# Altium PCB RF_PCB-v1.PcbDoc (part 2 of 2)
Units mil, origin at the board's own origin, x right, y up, seen from the top; angles counter-clockwise.
Board outline 4468.5 x 3267.72 mil, 2 copper layers (Top Layer, Bottom Layer); 64 components, 52 nets, 328 pads, 70 vias.
Unrouted connection lines stored in the file: 1.
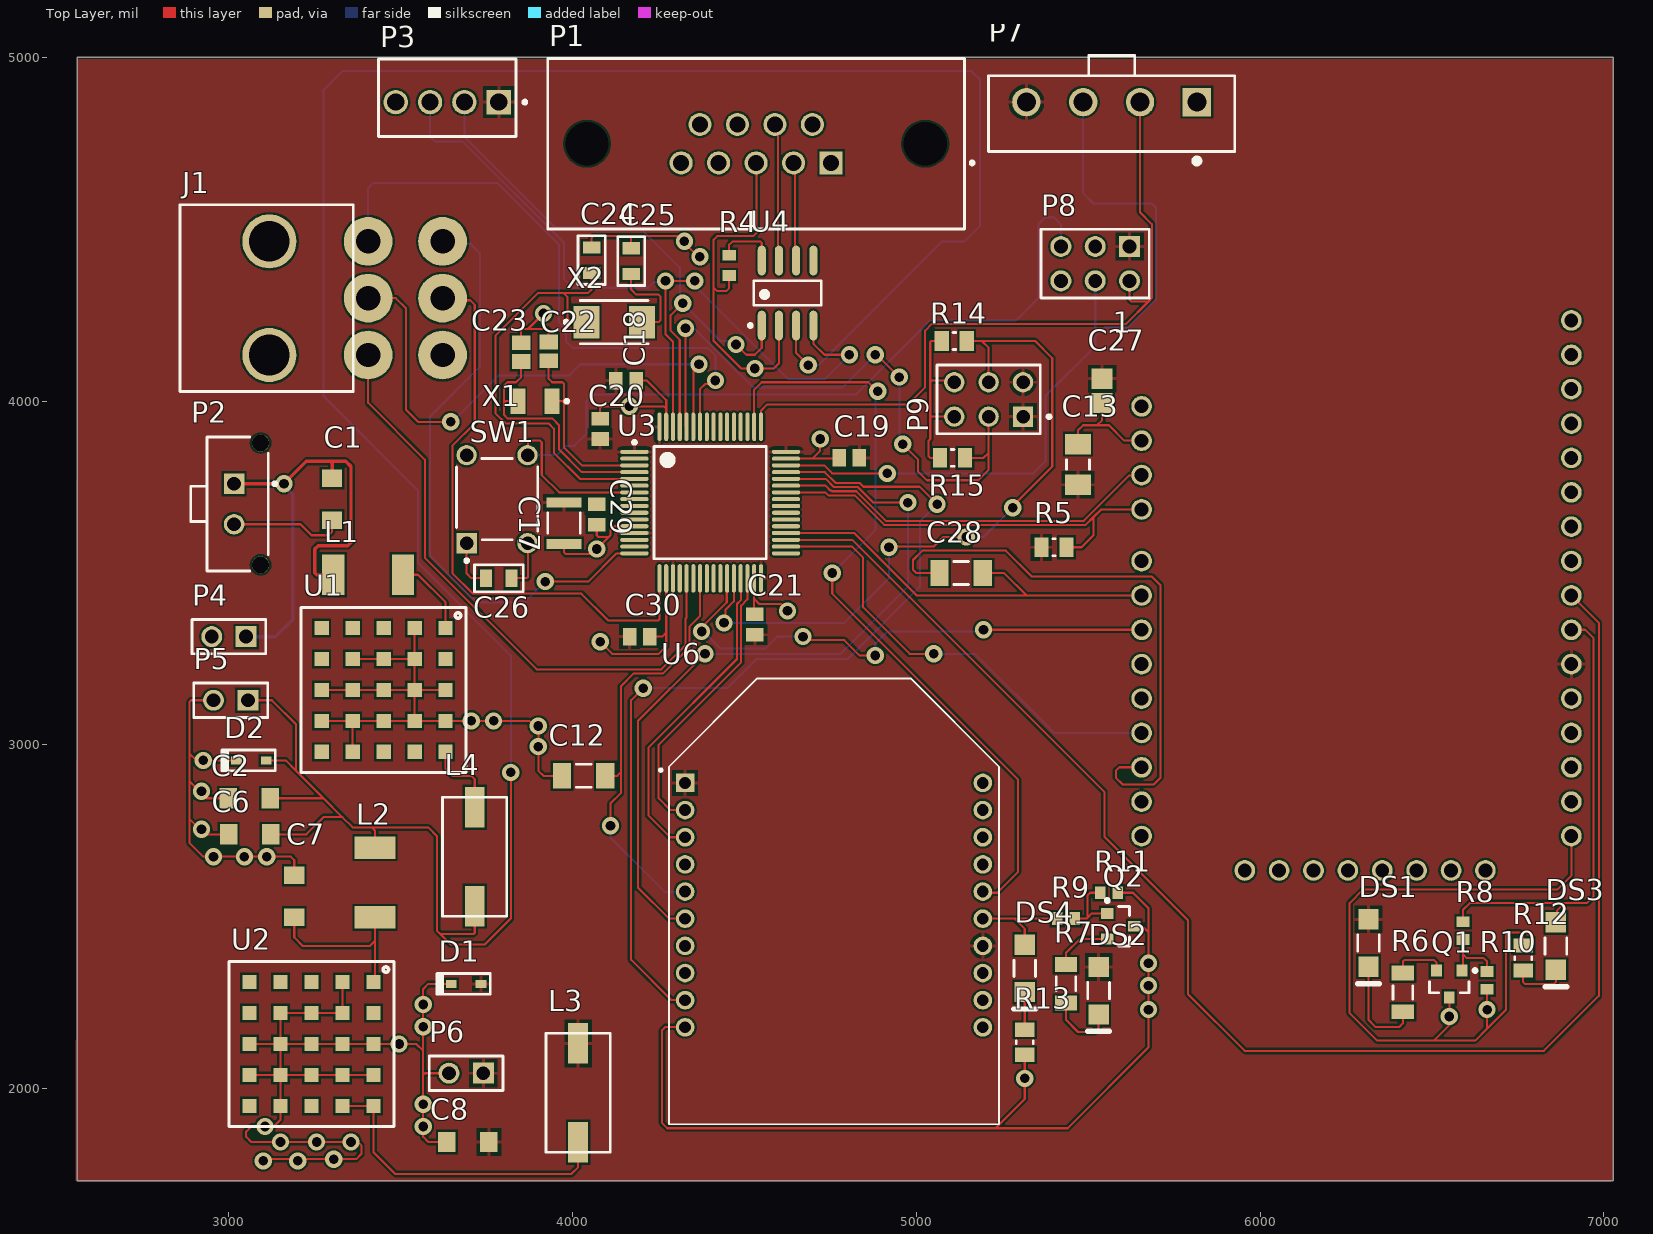
[diagram p0: Top Layer view]

## Via types
v1: diameter 50, hole 28, Top Layer to Bottom Layer, 70 vias

## Nets (pads, with @x,y where several pads share a name; then routed paths per layer and width w, separated by ;. In a path a pad name is that pad's centre, name@x,y a point inside that pad or via, vN(x,y) a via of type N, cw(c..) or ccw(c..) an arc to the next point about the centre after c; other vN are vias at no path point) (continued)
BOOT1: (continued)
  Top Layer w6: v1@4445,3360 4445,3393.94 4468.9,3417.84 U3.28 ; v1(4920,3575) 4922,3577 5049.5,3577 5077.5,3605 v1(5145,3605) ; R14.2 5190,4175 ; P9.4 5210,4155 5190,4175 ; v1(5280,3690) 5280,3695 5395,3810 5395,4125 5345,4175 5190,4175
  Bottom Layer w6: v1(4440,3355) 4790,3355 4920,3485 v1(4920,3575) ; v1(5145,3605) 5195,3605 v1(5280,3690)
CANH: P1.7 U4.7 | length 400.9
  Top Layer w6: P1.7 4596.63,4796.48 4596.63,4412.35 U4.7
CANL: P1.2 U4.6 | length 287.3
  Top Layer w6: P1.2 4646.63,4689.2 4646.63,4412.35 U4.6
GND: 1.1 1.11 1.13 1.22 1.35 C1.2 C2.1 C6.2 C7.1 C8.1 C12.1 C17.1 C18.1 C19.1 C20.1 C21.1 C22.1 C23.1 C24.1 C25.1 C28.1 C29.1 C30.1 D1.1 D2.1 P1.3 P1.6 P2.2 P3.4 P4.2 P5.2 P6.2 P7.1 P8.3 P9.5 P9.6 Q1.3 Q2.3 R4.1 R10.2 R11.2 R12.1 R13.1 R14.1 R15.1 SW1.2 U1.A3 U1.A4 U1.B1 U1.B2 U1.B3 U1.B4 U1.C2 U1.C3 U1.C4 U1.D2 U1.D3 U1.D4 U1.D5 U1.E3 U1.E4 U2.A3 U2.A4 U2.B1 U2.B2 U2.B3 U2.B4 U2.C2 U2.C3 U2.C4 U2.D2 U2.D3 U2.D4 U2.D5 U2.E3 U2.E4 U3.12 U3.18 U3.31 U3.47 U3.63 U4.2 U6.10 | length 16704.1
  Top Layer w6: P5.2 2950,3135 2945,3130 2890,3130 2885,3125 2885,2975 ; C2.1 2935,2845 2885,2895 ; C6.2 2930,2740 2885,2785 ; P2.2 3208.11,3641.89 3240,3610 3290,3610 3300,3620 C1.2 ; D2.1 v1(2925,2955) 2905,2955 2885,2975 ; U2.E4 U2.D4 ; U2.E3 U2.D3 ; v1@3100,1795 v1(3305,1795) 3370,1795 3385,1810 3385,1835 3375,1845 v1(3355,1845) v1(3255,1845) v1(3150,1845) 3065,1845 3050,1860 3050,1875 3065,1890 v1(3105,1890) 3130,1890 3149.84,1909.84 U2.D5 U2.D4 ; C7.1 3190,2665 3180,2675 v1(3110,2675) v1(3045,2675) v1(2955,2675) 2925,2675 2885,2715 2885,2785 ; U1.E4 U1.D4 ; U1.E3 U1.D3 U1.C3 U1.B3 ; U2.B1 U2.B2 U2.C2 U2.D2 U2.D3 ; U1.D5 U1.D4 ; U1.D2 U1.C2 U1.B2 ; U2.A4 U2.B4 U2.C4 U2.D4 ; U1.B1 U1.B2 ; U1.A3 U1.B3 ; C8.1 3580,1845 3565,1860 v1(3565,1890) v1(3565,1955) 3565,2040 ; P6.2 3570,2045 3565,2040 ; D1.1 3580,2305 3565,2290 v1(3565,2245) v1(3565,2180) 3565,2110 ; C23.1 3850,4205 3855,4210 3870,4210 ; v1(3915,4255) 3870,4210 ; C22.1 3930,4205 3925,4210 3870,4210 ; C12.1 3915,2910 3900,2925 v1(3900,2995) v1(3900,3055) 3888.09,3055 3873.25,3069.84 U1.A4 U1.B4 ; C17.1 3975,3560 3980,3555 4055,3555 v1(4070,3570) 4105,3605 ; C24.1 4055,4475 4060,4480 4165,4480 ; C29.1 4070,3610 4075,3605 4105,3605 ; v1(4080,3300) 4115,3265 4250,3265 4272.05,3287.05 4272.05,3327.05 ; C20.1 4080,3980 4085,3985 v1(4165,3985) 4265,3985 4272.05,3977.95 ; C25.1 4170,4475 4165,4480 ; U3.12 4121.1,3636.1 4110,3625 4110,3610 4105,3605 ; C18.1 4215,4060 4272.05,4002.95 4272.05,3977.95 ; C30.1 4260,3315 4272.05,3327.05 ; U3.18 4272.05,3327.05 ; U3.63 4272.05,3977.95 ; U6.10 4325.5,2180 4270,2180 4260,2170 4260,1900 4275,1885 5230,1885 ; v1(4370,4420) 4365,4420 4305,4480 4165,4480 ; R4.1 4455,4328.51 4446.49,4320 4420,4320 4410,4330 ; U3.31 4527.95,3425 ; C21.1@4530,3394.53 4527.95,3396.57 4527.95,3425 ; P1.3 4535,4691.77 4535,4490 4525,4480 4420,4480 4410,4470 4410,4330 ; U4.2 4600,4110 4585,4095 v1(4530,4095) 4490,4095 4410,4175 4410,4330 ; U3.47 4696.71,3832.95 ; v1(4625,3390) 4605,3410 4542.95,3410 4527.95,3425 ; v1(4720,3890) 4720,3856.24 4696.71,3832.95 ; C19.1 4772.95,3832.95 4696.71,3832.95 ; C28.1 5000,3500 4990,3510 4990,3538 5017,3565 5260,3565 5335,3490 5685,3490 5710,3465 5710,2905 5690,2885 5600,2885 5580,2905 5580,2925 5590,2935 1.11 ; R15.1 5040,3835 5035,3840 5035,3885 5040,3890 5040,3960 ; R14.1 5043.51,4175 5040,4171.49 5040,4055 ; P9.5 5045,3955 5040,3960 ; P9.6 5105,4060 5045,4060 5040,4055 ; R13.1 v1(5315,2030) 5315,1970 5230,1885 ; R11.2 5630,2570 5675,2525 5675,2455 ; Q2.3 5657.4,2472.6 5675,2455 ; Q1.3 v1(6550,2210) 6550,2185 6505,2140 ; R10.2 v1(6660,2230) 6660,2175 ; R12.1 6765,2445 6755,2455 6720,2455 6715,2450 6715,2230 6660,2175 ; 1.22 6905,2620 6865,2580 6300,2580 6260,2540 6260,2220 6340,2140 6505,2140 ; 2885,2785 2885,2895 ; 2885,2895 2885,2975 ; U2.D4 U2.D3 ; U2.D3 U2.C3 U2.B3 U2.A3 3545,2130 3565,2110 ; U1.D4 U1.C4 U1.B4 ; U1.B4 U1.B3 ; U1.B3 U1.B2 ; 3565,2040 3565,2110 ; 5040,3960 5040,4055 ; 5230,1885 5440,1885 5675,2120 v1(5675,2230) v1(5675,2300) v1(5675,2365) 5675,2455 ; 6505,2140 6625,2140 6660,2175
  other v1: 3100,1790 3200,1790 3495,2130 2920,2755 2920,2865 3705,3070 3770,3070 4325,4465
Net1_2: 1.2 C13.1 C27.1 | length 320.6
  Top Layer w6: C13.1 5470,3915 5485,3930 5525,3930 ; C27.1 5540,3945 5525,3930 ; 1.2 5605,3885 5560,3930 5525,3930
Net1_3: 1.3 U3.43 | length 1132
  Top Layer w6: U3.43 4735.79,3754.21 4750,3740 4753.03,3740 4755.03,3738 4825,3738 4911,3652 5487,3652 5619.39,3784.39 5654.39,3784.39 1.3
Net1_4: 1.4 R5.1 U3.42 | length 1238.4
  Top Layer w6: U3.42 4735.03,3734.53 4743.56,3726 4820,3726 4906,3640 5491.97,3640 5515,3663.03 ; R5.1 5480,3575 5515,3610 5515,3663.03 ; 1.4 5536.97,3685 5515,3663.03
Net1_6: 1.6 C28.2 U3.36 | length 1263.6
  Top Layer w6: U3.36 4818.58,3616.42 5000,3435 5320,3435 ; C28.2 5255,3500 5320,3435 ; 1.6 5320,3435
Net1_7: 1.7 U3.27 | length 1574.8
  Top Layer w6: v1(4375,3330) 4375,3341.92 4448.1,3415.02 4448.1,3483.42 U3.27 ; v1(4670,3315) 4680,3305 4790,3305 4835,3260 v1(4880,3260) ; v1(5195,3335) 1.7
  Bottom Layer w6: v1(4375,3330) 4380,3330 4430,3280 4560,3280 4595,3315 v1(4670,3315) ; v1(4880,3260) 4880,3295 4915,3330 5190,3330 v1(5195,3335)
Net1_10: 1.10 U3.34 | length 1344
  Top Layer w6: U3.34 4812.95,3577.05 4845,3545 4845,3400 4980,3265 v1(5050,3265)
  Bottom Layer w6: v1(5050,3265) 5170,3265 5400,3035 1.10
Net1_28: 1.28 DS3.1 R8.1 | length 1322.8
  Top Layer w6: R8.1 6590,2520 6610,2540 6885,2540 ; DS3.1 6863.91,2487.81 6863.91,2518.91 6885,2540 ; 1.28 6945,3335 6970,3310 6970,2560 6950,2540 6885,2540
Net1_29: 1.29 U3.35 | length 4446.9
  Top Layer w6: U3.35 4813.27,3596.73 4860,3550 5546.43,2863.57 5546.43,2733.57 5790,2490 5790,2275 5955,2110 6825,2110 6985,2270 6985,3355 1.29
NetC7_2: C7.2 L2.2 U2.A1 | length 500.8
  Top Layer w6: C7.2 3190,2440 3215,2415 3410,2415 3425,2430 ; U2.A1 3425,2315 3425,2430 ; L2.2 3425,2430
NetC12_2: C12.2 U3.23 U6.5 | length 1244
  Top Layer w6: C12.2 4130,2910 4140,2920 ; v1(4110,2765) 4110,2830 4140,2860 4140,2920 ; U3.23 4370.47,3375.47 4340,3345 4340,3285 4263,3208 4178,3208 4140,3170 4140,2920
  Bottom Layer w6: v1(4110,2765) 4110,2730 4267.51,2572.49 4325.99,2572.49 U6.5
NetC22_2: C22.2 U3.3 X1.1 | length 552.5
  Top Layer w6: C22.2 3930,4065 3940,4055 3970,4055 3975,4050 3975,3995 ; X1.1 3970,4000 3975,3995 ; U3.3 4026.73,3813.27 3975,3865 3975,3995
NetC23_2: C23.2 U3.4 X1.2 | length 722.7
  Top Layer w6: X1.2 3805,4000 3800,3995 ; C23.2 3850,4070 3835,4055 3810,4055 3800,4045 3800,3995 ; U3.4 4026.42,3793.58 3960,3860 3960,3930 3940,3950 3810,3950 3800,3960 3800,3995
NetC24_2: C24.2 U3.5 X2.1 | length 1293.7
  Top Layer w6: X2.1@4025,4245 X2.1 3995,4230 3985,4240 3985,4302.5 3972.5,4315 ; C24.2 4055,4325 4045,4315 3972.5,4315 ; U3.5 4021.1,3773.9 3945,3850 3945,3920 3930,3935 3805,3935 3775,3965 3775,4190 3900,4315 3972.5,4315
NetC25_2: C25.2 X2.2 | length 263.9
  Top Layer w6: C25.2 4170,4325 4185,4310 4250,4310 4255,4305 4255,4235 4250,4230 X2.2
NetC26_1: C26.1 SW1.3 | length 148.2
  Top Layer w6: C26.1 3866.49,3485 3870,3488.51 3870,3585.63 SW1.3
NetC26_2: C26.2 SW1.1 | length 150.3
  Top Layer w6: SW1.1 3691.42,3498.58 3705,3485 C26.2
NetDS1_2: DS1.2 R6.2 | length 301.3
  Top Layer w6: DS1.2 6315,2200 6335,2180 6405,2180 6415,2190 R6.2
NetDS2_2: DS2.2 R7.2 | length 203.6
  Top Layer w6: R7.2 5435,2200 5470,2165 5520,2165 5530,2175 DS2.2
NetDS3_2: DS3.2 R12.2 | length 168.8
  Top Layer w6: R12.2 6765,2310 6770,2305 6855,2305 6860,2310 DS3.2
NetDS4_1: DS4.1 R9.1 U6.15 | length 304.4
  Top Layer w6: U6.15 5285.5,2494.5 ; DS4.1 5315,2465 5285.5,2494.5 ; R9.1 5408.91,2494.5 5285.5,2494.5
NetDS4_2: DS4.2 R13.2 | length 109.7
  Top Layer w6: R13.2 DS4.2
NetL1_2: L1.2 U1.A1 | length 231.5
  Top Layer w6: L1.2 3550,3495 3630.16,3414.84 U1.A1
NetL3_1: L3.1 U2.A5 U2.B5 | length 926.8
  Top Layer w6: U2.B5 U2.A5 3420.32,1815.91 3484.25,1751.97 3996.06,1751.97 4015.75,1771.65 L3.1
NetL4_1: L4.1 U1.A5 | length 228.2
  Top Layer w6: U1.A5 3630.16,2930.16 3650.32,2910 3705,2910 3715,2900 L4.1
NetQ1_1: Q1.1 R8.2 R10.1 | length 199.6
  Top Layer w6: Q1.1 6590,2346.34 6590,2390.37 ; R8.2 6590,2390.37 ; R10.1 6660,2370 6650,2380 6600.37,2380 6590,2390.37
NetQ1_2: Q1.2 R6.1 | length 160.4
  Top Layer w6: R6.1 6415,2370 6420,2375 6505,2375 6512.6,2367.4 Q1.2
NetQ2_1: Q2.1 R9.2 R11.1 | length 205.8
  Top Layer w6: R9.2 5495,2495 5497.4,2497.4 ; R11.1 5505,2570 5497.4,2562.4 5497.4,2497.4 ; Q2.1 5510,2510 5497.4,2497.4
NetQ2_2: Q2.2 R7.1 | length 170.5
  Top Layer w6: R7.1 5435,2395 5475.2,2435.2 Q2.2
NetR4_2: R4.2 U4.8 | length 182.7
  Top Layer w6: R4.2 4455,4455 4465,4465 4545,4465 4550,4460 U4.8
NetU3_29: U3.29 U6.3 | length 934.4
  Top Layer w6: U6.3 4283.5,2731.5 4220,2795 4220,2992 4478,3250 4478,3409.97 4489.01,3420.99 4489.01,3484.1 U3.29
NetU3_30: U3.30 U6.2 | length 837.8
  Top Layer w6: U6.2 4284.5,2810.5 4250,2845 4250,3000 4490,3240 4490,3405 4508.27,3423.27 U3.30
NetU3_44: U3.44 U6.6 | length 2234.1
  Top Layer w6: U6.6 4280.5,2494.5 4190,2585 4190,3070 v1(4385,3265) ; U3.44 4736.1,3773.9 4760,3750 4830,3750 4875,3705 v1(4975,3705)
  Bottom Layer w6: v1(4385,3265) 4780,3265 4975,3460 v1(4975,3705)
NetU3_45: U3.45 U6.9 | length 2676.4
  Top Layer w6: v1(4205,3165) 4170,3130 4170,2375 4287.5,2257.5 U6.9 ; U3.45 4733.42,3793.58 4765,3762 4834.97,3762 4845.99,3750.99 5009.01,3750.99 v1(5060,3700)
  Bottom Layer w6: v1(4205,3165) 4450,3165 4535,3250 4800,3250 5010,3460 5010,3650 v1(5060,3700)
NetU3_50: U3.50 U6.16 | length 2292.8
  Top Layer w6: U3.50 4527.95,4032.95 4550,4055 4860,4055 4886,4029 v1(4887.5,4029) ; v1(4755,3500) 4755,3440 5295,2900 5295,2630 5235,2570 5196.5,2570 U6.16
  Bottom Layer w6: v1(4755,3500) 4881,3626 4881,4022.5 v1(4887.5,4029)
NRST: P8.5 SW1.4 U3.7 | length 2561
  Top Layer w6: SW1.4 3870,3844.37 3870,3881.49 3873.51,3885 3905,3885 3910,3880 3910,3785 3960.47,3734.53 U3.7
  Bottom Layer w6: SW1.4 3952.95,3842.95 3980,3870 4005,3870 4040,3905 4040,4000 4060,4020 4825,4020 5015,4210 5040,4235 5290,4235 5355,4300 5355,4515 5375,4535 5400,4535 5420,4515 P8.5
PA2: J1.1 U3.16 | length 1772.4
  Top Layer w6: v1(3920,3475) 4045,3475 4127.36,3557.36 U3.16
  Bottom Layer w6: J1.1 3627.94,4458.6 3701.4,4458.6 3730,4430 3730,4100 3585,3955 3585,3550 3720,3415 3860,3415 v1(3920,3475)
PA3: J1.2 U3.17 | length 1688
  Top Layer w6: J1.2 3627.58,4293.6 3701.4,4293.6 3715,4280 3715,3935 3650,3870 3650,3500 3710,3440 4025,3440 4102.64,3362.36 4248.85,3362.36 4252.36,3365.88 U3.17
PA5: J1.6 U3.21 | length 1775.1
  Top Layer w6: J1.6 3405,3995 3570,3830 3570,3545 3895,3220 4258.03,3220 4328,3289.97 4328,3366.65 4331.1,3369.76 U3.21
PB6: J1.4 U3.58 | length 1769.5
  Top Layer w6: U3.58 4370,3925.95 4370,4035 4385,4050 4405,4050 v1(4415,4060)
  Bottom Layer w6: J1.4 3405,4620 3420,4635 3780,4635 3960,4455 3960,4230 3980,4210 3980,4175 4000,4155 4393.03,4155 4415,4133.03 v1(4415,4060)
PB7: J1.5 U3.59 | length 1542.6
  Top Layer w6: J1.5 3485.35,4299.65 3515,4270 3515,3975 3550,3940 v1(3645,3940) ; U3.59 4350.79,4090.79 v1(4367.5,4107.5)
  Bottom Layer w6: v1(3645,3940) 3650,3940 3785,4075 3990,4075 4022.5,4107.5 v1(4367.5,4107.5)
PB8: P3.2 U3.61 U4.1 | length 1722.8
  Top Layer w6: U3.61 4311.42,4178.58 4285,4205 4285,4250 v1(4320,4285) ; v1(4475,4165) 4505,4135 4530,4135 4550,4155 U4.1
  Bottom Layer w6: P3.2 3685,4770 3950,4505 4195,4505 4311.58,4388.42 4311.58,4293.42 v1(4320,4285) 4430,4175 v1@4460,4175
PB9: P3.3 U3.62 U4.4 | length 2332.3
  Top Layer w6: U3.62 4291.73,4173.27 4270,4195 v1(4270,4350) v1(4355,4350) ; U4.4 4700,4167.56 4732.56,4135 v1(4805,4135)
  Bottom Layer w6: P3.3 3585,4770 3600,4755 3680,4755 3975,4460 3975,4355 4000,4330 4220,4330 4236,4346 4266,4346 v1(4270,4350) ; v1(4355,4350) 4363.42,4341.58 4363.42,4326.58 4625,4065 4735,4065 v1(4805,4135)
SWCLK: P7.2 P8.2 U3.49 | length 2113.2
  Top Layer w6: U3.49 4547.64,3972.64 4565,3990 4975,3990 5025,4040 5025,4205 5045,4225 5610,4225 5675,4290 ; P8.2 5620,4295 5625,4290 5675,4290 ; P7.2 5650.35,4549.65 5685,4515 5685,4300 5675,4290
SWDIO: P7.3 P8.4 U3.46 | length 2346.9
  Top Layer w6: U3.46 4731.73,3813.27 4755,3790 v1(4915,3790)
  Bottom Layer w6: v1(4915,3790) 5340,3790 5375,3825 5375,4015 5520,4160 5520,4187.5 ; P7.3 5485,4605 5515,4575 5685,4575 5695,4565 5696.49,4565 5696.49,4296.49 5615,4215 5547.5,4215 5520,4187.5 ; P8.4 5520,4187.5
V3.3: 1.27 C8.2 C13.2 C17.2 C18.2 C19.2 C20.2 C21.2 C27.2 C29.2 C30.2 D1.2 DS1.1 DS2.1 L3.2 P3.1 P6.1 P7.4 P8.1 P9.1 P9.2 R5.2 U3.1 U3.13 U3.19 U3.32 U3.48 U3.64 U6.1 U6.14
pads on no net: 1.5 1.8 1.9 1.12 1.14 1.15 1.16 1.17 1.18 1.19 1.20 1.21 1.23 1.24 1.25 1.26 1.30 1.31 1.32 1.33 1.34 1.36 1.37 J1. J1.3 P1.1 P1.4 P1.5 P1.8 P1.9 P1.MH1 P1.MH2 P2.MH1 P2.MH2 P8.6 U1.A2 U1.B5 U1.C1 U1.C5 U1.D1 U1.E1 U1.E2 U1.E5 U2.A2 U2.C1 U2.C5 U2.D1 U2.E1 U2.E2 U2.E5 U3.2 U3.6 U3.8 U3.9 U3.10 U3.11 U3.14 U3.15 U3.20 U3.22 U3.24 U3.25 U3.26 U3.33 U3.37 U3.38 U3.39 U3.40 U3.41 U3.51 U3.52 U3.53 U3.54 U3.55 U3.56 U3.57 U4.5 U6.4 U6.7 U6.8 U6.11 U6.12 U6.13 U6.17 U6.18 U6.19 U6.20

## Polygon pours and split planes (outlines as drawn)
V3.3 on Top Layer "v3.3" (solid, pour order 0): 2560,5000 2565,4995 7025,4995 7025,1735 7020,1730 2555,1730
GND on Bottom Layer "gnd" (solid, pour order 1): 2560,5010 7030,5010 7035,5005 7030,5000 7030,1730 2565,1730 2560,1735